# Altium PCB SmartSocket V1.0.PcbDoc (part 2 of 4)
Units mm, origin at the board's own origin, x right, y up, seen from the top; angles counter-clockwise.
Board outline 49.2 x 69.88 mm, 2 copper layers (Top Layer, Bottom Layer), stack 1.671 mm thick; 117 components, 80 nets, 371 pads, 48 vias.
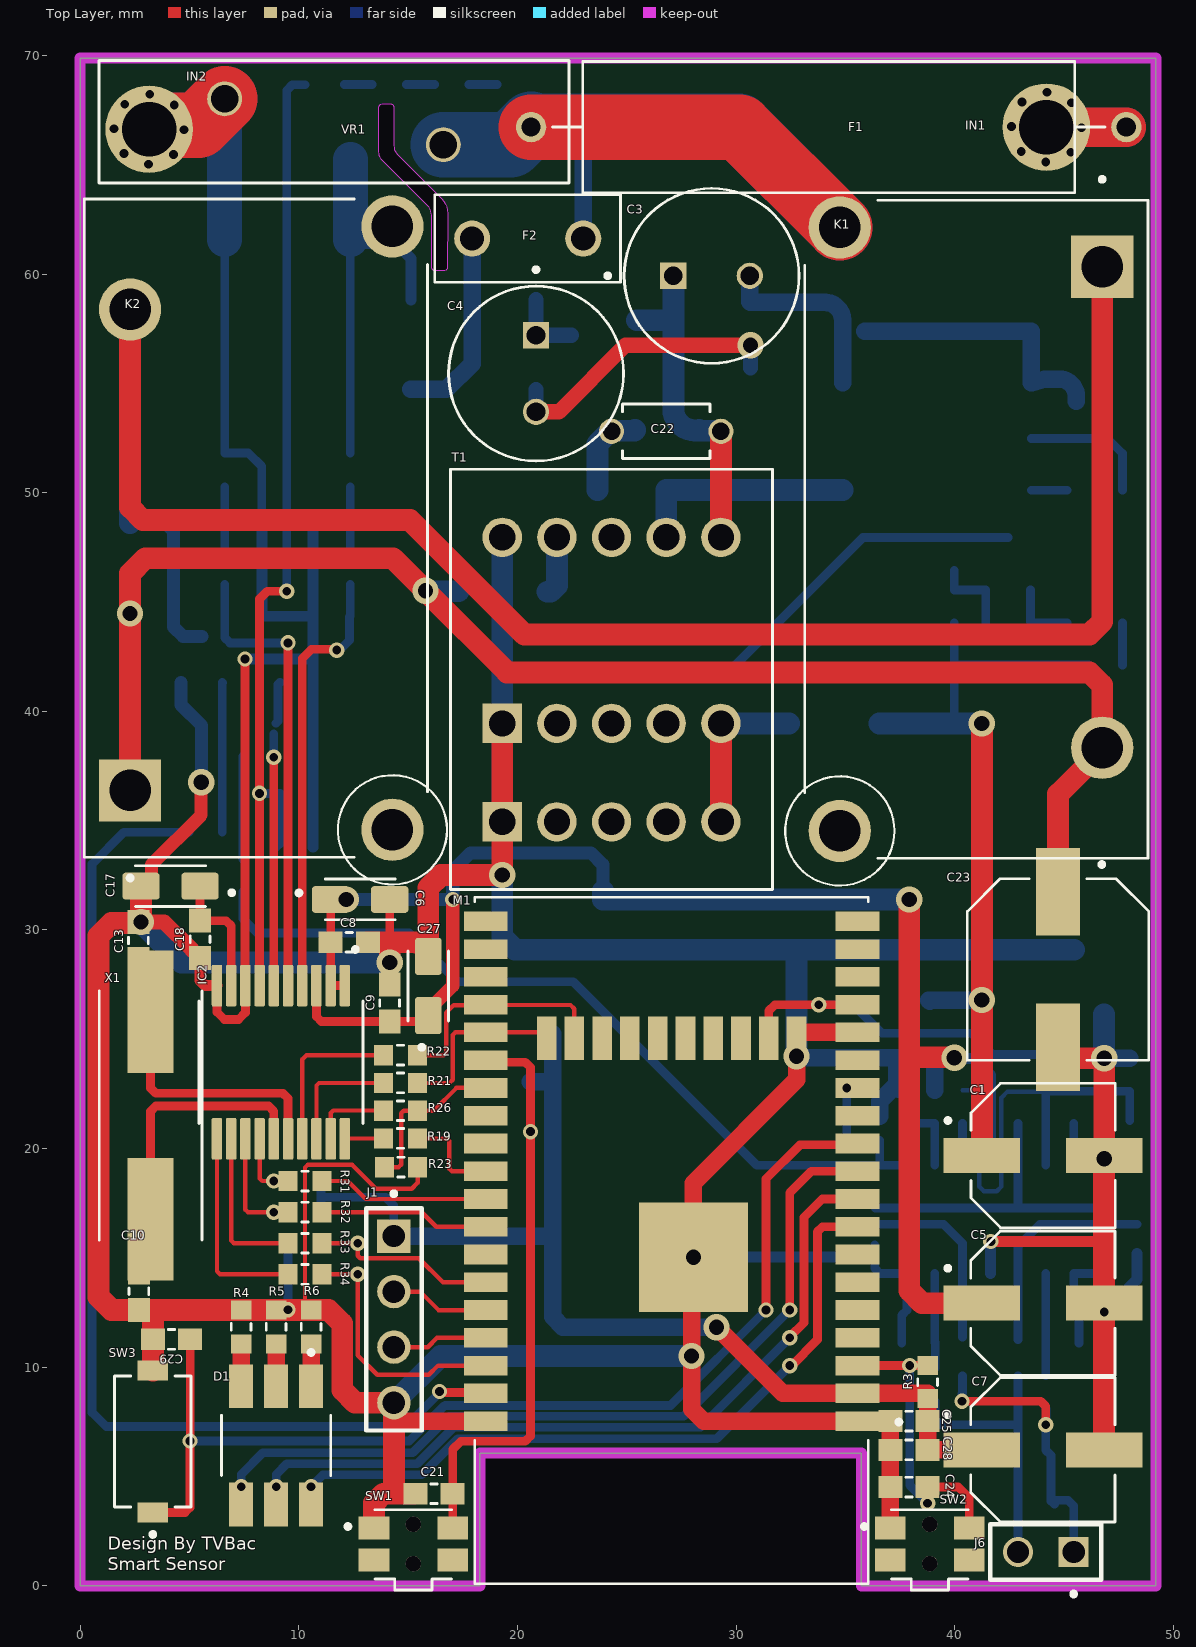
[diagram p0: Top Layer view]

## Part data (continued)
C25 C26: library part "CAP; 0.1uF; 10V; 0603; SMD; CC0603KRX7R6BB104", "Multilayer Ceramic Capacitor, 0.1 uF, 10 V, ± 10%, X7R, 0603 [1608 Metric]", Manufacturer=Yageo, Manufacturer Part Number=CC0603KRX7R6BB104, Supplier Part Number=311-4055-1-ND, Category="Ceramic Capacitors", ComponentLink1Description=https://datasheet.ciiva.com/11586/upy-gphc-x7r-6-3v-to-50v-8-11586327.pdf?src-supplier=Avnet, ComponentLink1URL=https://datasheet.ciiva.com/11586/upy-gphc-x7r-6-3v-to-50v-8-11586327.pdf?src-supplier=Avnet, ComponentLink2Description="Link Digikey", ComponentLink2URL=https://www.digikey.com/en/products/detail/yageo/CC0603KRX7R6BB104/5883741, Designer=TVBac, Halogen Free=5694HalogenFree, Lead Free=5697LeadFree, Material=4241ConductorMaterial, Pricing="1=0.1, 10=0.067, 50=0.0398, 100=0.0314, 500=0.02316, 1000=0.01918, 4000=0.01633, 8000=0.01519, 12000=0.01443, 28000=0.01367, 100000=0.01035, 200000=0.0101, 400000=0.00949 (USD)", RoHS=Yes, Stock=113177, Supplier=Digikey
C28: library part "CAP; 1uF; 16V; 0603; SMD; CC0603KRX7R7BB105", "0603 1 uF 16 V ±10 % Tolerance X7R SMT Multilayer Ceramic Capacitor", Case Code (Imperial)=0603, Case Code (Metric)=1608, Dielectric=X7R, Manufacturer=Yageo, Manufacturer Part Number=CC0603KRX7R7BB105, Max Operating Temperature=125°C, Min Operating Temperature=-55°C, Package Quantity=1, Supplier Part Number=311-1446-1-ND, Tolerance=10%, Voltage=16V, Case/Package=0603, Category="Ceramic Capacitors", ComponentLink1Description=https://datasheet.ciiva.com/8033/1734573-8033801.pdf?src-supplier=Element14, ComponentLink1URL=https://datasheet.ciiva.com/8033/1734573-8033801.pdf?src-supplier=Element14, ComponentLink2Description=https://datasheet.ciiva.com/8033/1734573-8033800.pdf?src-supplier=Element14, ComponentLink2URL=https://datasheet.ciiva.com/8033/1734573-8033800.pdf?src-supplier=Element14, ComponentLink3Description=https://datasheet.ciiva.com/7978/1489800-7978143.pdf?src-supplier=Element14, ComponentLink3URL=https://datasheet.ciiva.com/7978/1489800-7978143.pdf?src-supplier=Element14, ComponentLink4Description=https://datasheet.ciiva.com/28450/1489800-28450557.pdf?src-supplier=Element14, ComponentLink4URL=https://datasheet.ciiva.com/28450/1489800-28450557.pdf?src-supplier=Element14, ComponentLink5Description=https://datasheet.ciiva.com/176/mlccorderingcode-176789.pdf?src-supplier=Digikey, ComponentLink5URL=https://datasheet.ciiva.com/176/mlccorderingcode-176789.pdf?src-supplier=Digikey, ComponentLink6Description=https://datasheet.ciiva.com/176/mlccorderingcode-176788.pdf?src-supplier=Digikey, ComponentLink6URL=https://datasheet.ciiva.com/176/mlccorderingcode-176788.pdf?src-supplier=Digikey, ComponentLink7Description=https://datasheet.ciiva.com/176/mlccorderingcode-176790.pdf?src-supplier=Digikey, ComponentLink7URL=https://datasheet.ciiva.com/176/mlccorderingcode-176790.pdf?src-supplier=Digikey, ComponentLink8Description=https://datasheet.ciiva.com/5425/upy-gphc-x7r-6-3v-to-50v-8-12304-5425495.pdf?src-supplier=Mouser, ComponentLink8URL=https://datasheet.ciiva.com/5425/upy-gphc-x7r-6-3v-to-50v-8-12304-5425495.pdf?src-supplier=Mouser, ComponentLink9Description="Link Digikey", ComponentLink9URL=https://www.digikey.com/en/products/detail/yageo/CC0603KRX7R7BB105/2833611?s=N4IgTCBcDaIMJwAwDZEGYDSAlAGgdizwCEiBGRAVhAF0BfIA, Construction=Flat, Depth=0.8mm, Designer=TVBac, Dissipation Factor=5%, Halogen Free=5694HalogenFree, Height=0.8mm, Lead Free=5697LeadFree, Length=1.6mm, Material=4241ConductorMaterial, Mounting Technology="Surface Mount", Packaging="Tape and Reel", Pins=2, Pricing="1=0.1, 10=0.066, 50=0.0392, 100=0.0308, 500=0.02274, 1000=0.01882, 4000=0.01785, 8000=0.01626, 12000=0.01545, 20000=0.01456, 28000=0.01404, 40000=0.01353, 100000=0.01313 (USD)", Radiation Hardening=No, Reach SVHC Compliant=Unknown, RoHS=Yes, RoHS Compliant=Yes, Series=CC, Stock=9165861, Supplier=Digikey, Termination=SMD/SMT, Thickness=0.035inch, Voltage Rating=16V, Voltage Rating (DC)=16V, Width=0.031inch
C32: library part "CAP; 0.01uF; 25V; 0603; SMD; CC0603JRX7R8BB103", "Surface Mount Ceramic Multilayer Capacitor 0.01uF 5% X7R 25V 0603 Paper T/R", Manufacturer=Yageo, Manufacturer Part Number=CC0603JRX7R8BB103, Supplier Part Number=311-3995-1-ND, Category="Ceramic Capacitors", ComponentLink1Description=https://datasheet.ciiva.com/11465/upy-gphc-x7r-6-3v-to-50v-8-11465030.pdf?src-supplier=Avnet, ComponentLink1URL=https://datasheet.ciiva.com/11465/upy-gphc-x7r-6-3v-to-50v-8-11465030.pdf?src-supplier=Avnet, ComponentLink2Description="Link Digikey", ComponentLink2URL=https://www.digikey.com/en/products/detail/yageo/CC0603JRX7R8BB103/5883656, Designer=TVBac, Pricing="1=0.1, 10=0.061, 50=0.035, 100=0.0271, 500=0.02036, 1000=0.016 (USD)", RoHS=Yes, Stock=4379, Supplier=Digikey
D1: library part "LED; RGB; SMD; BL-HBXJXGX32L", "5050 PLCC6 Rgb", Manufacturer="American Bright", Manufacturer Part Number=BL-HBXJXGX32L, Supplier Part Number=BL-HBXJXGX32LCT-ND, Category=LEDs, ComponentLink1Description=http://americanbrightled.com/pdffiles/plcc/BL-HBXJXGX32L.pdf?src-supplier=Digikey, ComponentLink1URL=http://americanbrightled.com/pdffiles/plcc/BL-HBXJXGX32L.pdf?src-supplier=Digikey, ComponentLink2Description="Link Digikey", ComponentLink2URL=https://www.digikey.com/en/products/detail/american-bright-optoelectronics-corporation/BL-HBXJXGX32L/9678124, Designer=TVBac, Pricing="1=0.63, 10=0.388, 100=0.223 (USD)", RoHS=No, Stock=17028, Supplier=Digikey
D2 D5 D7 D8: library part "DIODE; SMD; 1N4007FLN4007;", "Diode Gen Purp 1KV 1A SOD123FL", Forward Current=1A, Manufacturer="Sangdest Microelectronics", Manufacturer Part Number=1N4007FL, Max Forward Surge Current (Ifsm)=30A, Max Operating Temperature=150°C, Max Repetitive Reverse Voltage (Vrrm)=1kV, Max Reverse Current=5uA, Min Operating Temperature=-55°C, Supplier Part Number=1655-1N4007FLCT-ND, Category=Diodes, ComponentLink1Description="Link Digikey", ComponentLink1URL=https://www.digikey.com/en/products/detail/smc-diode-solutions/1N4007FL/11657817, Designer=TVBac, Height=1.1mm, Pricing="1=0.1, 10=0.058, 100=0.039, 500=0.02954, 1000=0.02627 (USD)", Reverse Voltage=1kV, RoHS=No, Stock=332632, Supplier=Digikey
D3: library part "DIODE; SMD; ABS10H", "Bridge Rectifiers 1A, 1000V, Standard Bridge Rectifier", Manufacturer="Taiwan Semiconductor", Manufacturer Part Number=ABS10H, Supplier Part Number=1801-ABS10HCT-ND, ComponentLink1Description="Link Digikey", ComponentLink1URL=https://www.digikey.com/en/products/detail/taiwan-semiconductor-corporation/ABS10H/7366098, Designer=TVBac, Pricing="1=0.49, 10=0.33, 100=0.2241, 500=0.17496, 1000=0.15869, 2000=0.14481 (USD)", Stock=4817, Supplier=Digikey
D4 D6: library part "DIODE; SMD; SCHOTTKY; SS34-HF", "Diode Schottky Si 40V 3A 2-Pin SMA T/R", Manufacturer=Comchip, Manufacturer Part Number=SS34-HF, Supplier Part Number=641-2115-1-ND, Category=LDO, ComponentLink1Description=http://www.comchiptech.com/admin/files/product/20190514101641.pdf?src-supplier=Digikey, ComponentLink1URL=http://www.comchiptech.com/admin/files/product/20190514101641.pdf?src-supplier=Digikey, ComponentLink2Description="Link Digikey", ComponentLink2URL=https://www.digikey.com/en/products/detail/comchip-technology/SS34-HF/10279693, Designer=TVBac, Pricing="1=0.46, 10=0.325, 100=0.164, 500=0.14536, 1000=0.11312, 2000=0.10124 (USD)", RoHS=Yes, RoHS Compliant=Yes, Stock=65957, Supplier=Digikey
F1: library part "FUSE; 20A; 0ADKP9200-RE", "Fuse 20A 600VAC 500VDC Time Delay 2-Pin Through Hole", Manufacturer=Bel, Manufacturer Part Number=0ADKP9200-RE, Supplier Part Number=5923-0ADKP9200-RE-ND, Category=Fuses, ComponentLink1Description=https://belfuse.com/resources/Datasheets/CircuitProtection/ds-CP-0adkx-series.pdf?src-supplier=Digikey, ComponentLink1URL=https://belfuse.com/resources/Datasheets/CircuitProtection/ds-CP-0adkx-series.pdf?src-supplier=Digikey, ComponentLink2Description=https://datasheet.octopart.com/0ADKP9200-RE-Bel-Fuse-datasheet-154833970.pdf?src-supplier=Master+Electronics, ComponentLink2URL=https://datasheet.octopart.com/0ADKP9200-RE-Bel-Fuse-datasheet-154833970.pdf?src-supplier=Master+Electronics, ComponentLink3Description="Link Digikey", ComponentLink3URL=https://www.digikey.com/en/products/detail/bel-fuse-inc/0ADKP9200-RE/7404484, Designer=TVBac, Pricing="1=2.13, 5=1.774, 10=1.64, 50=1.3664, 100=1.2626, 250=1.13684, 500=1.04966, 1000=0.96871, 5000=0.80225 (USD)", RoHS=Yes, Stock=157, Supplier=Digikey